# Altium PCB PCB2.pcbdoc
Units mil, origin at the board's own origin, x right, y up, seen from the top; angles counter-clockwise.
Board outline 2600 x 1800 mil, 2 copper layers (Top Layer, Bottom Layer); 16 components, 8 nets, 47 pads, 0 vias.
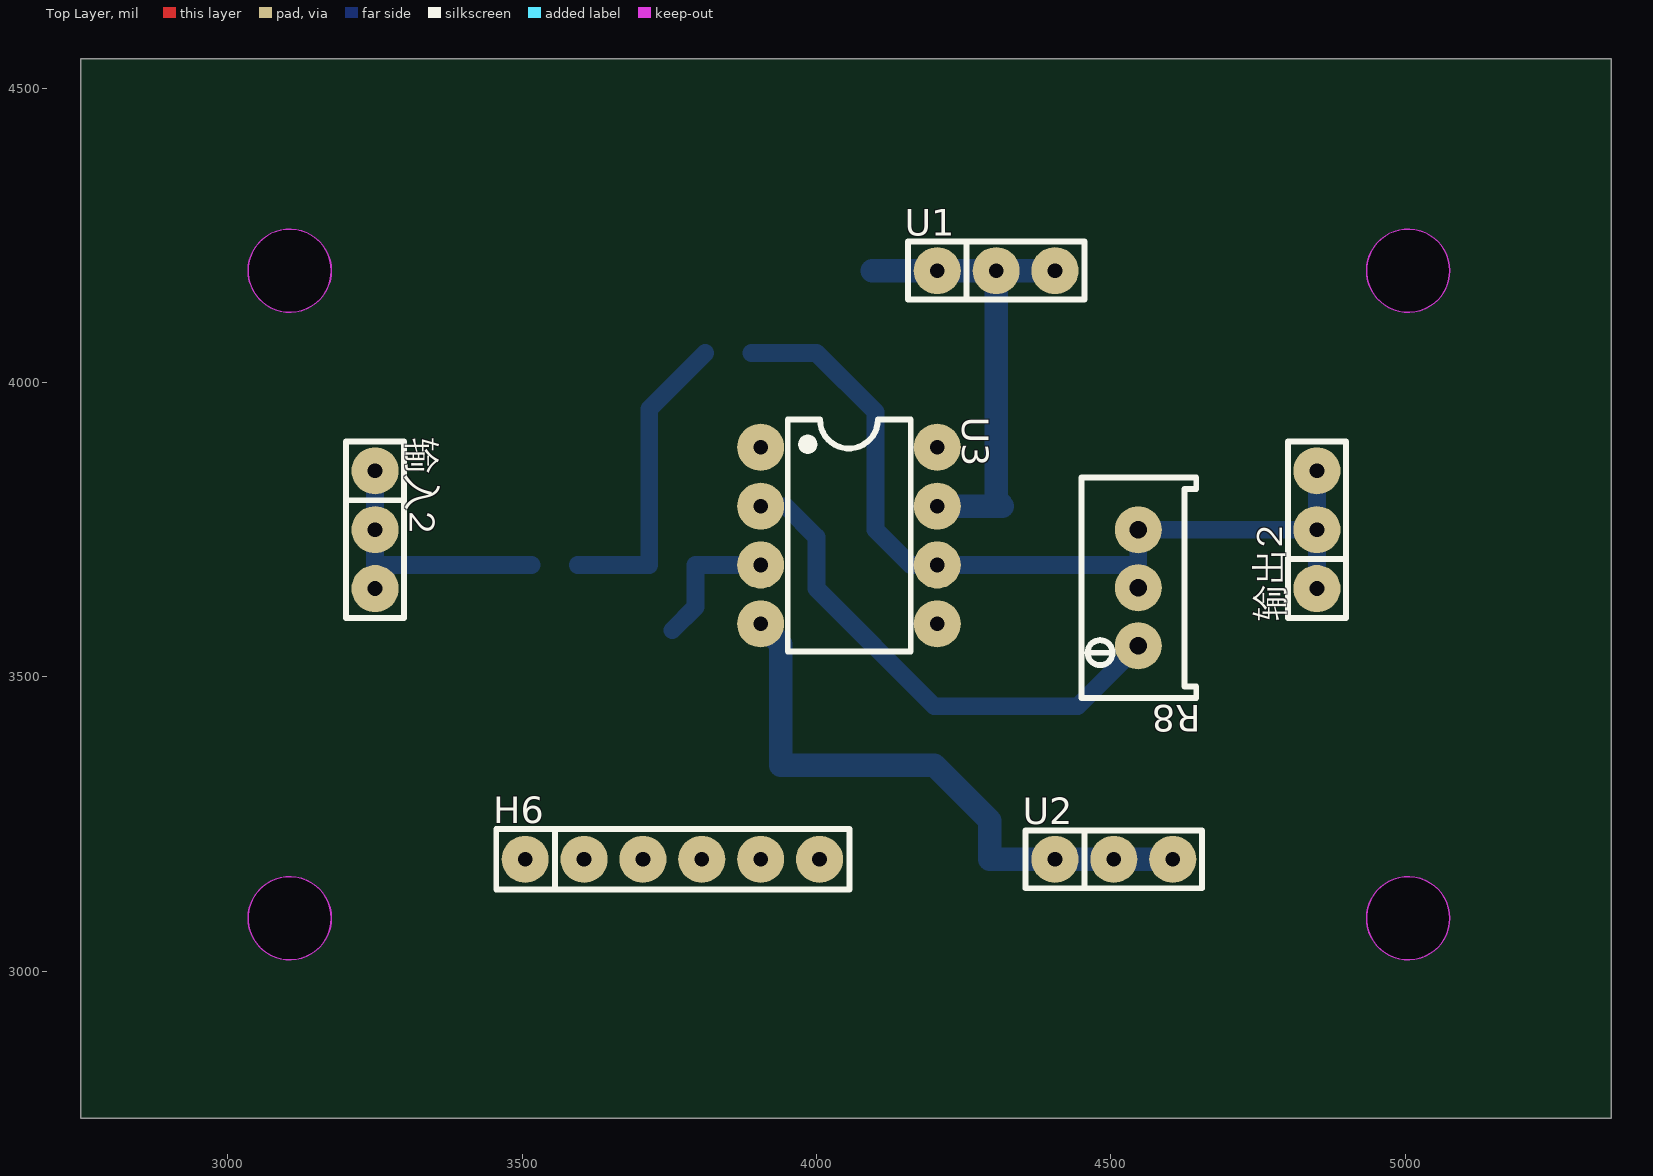
[diagram p0: Top Layer view]
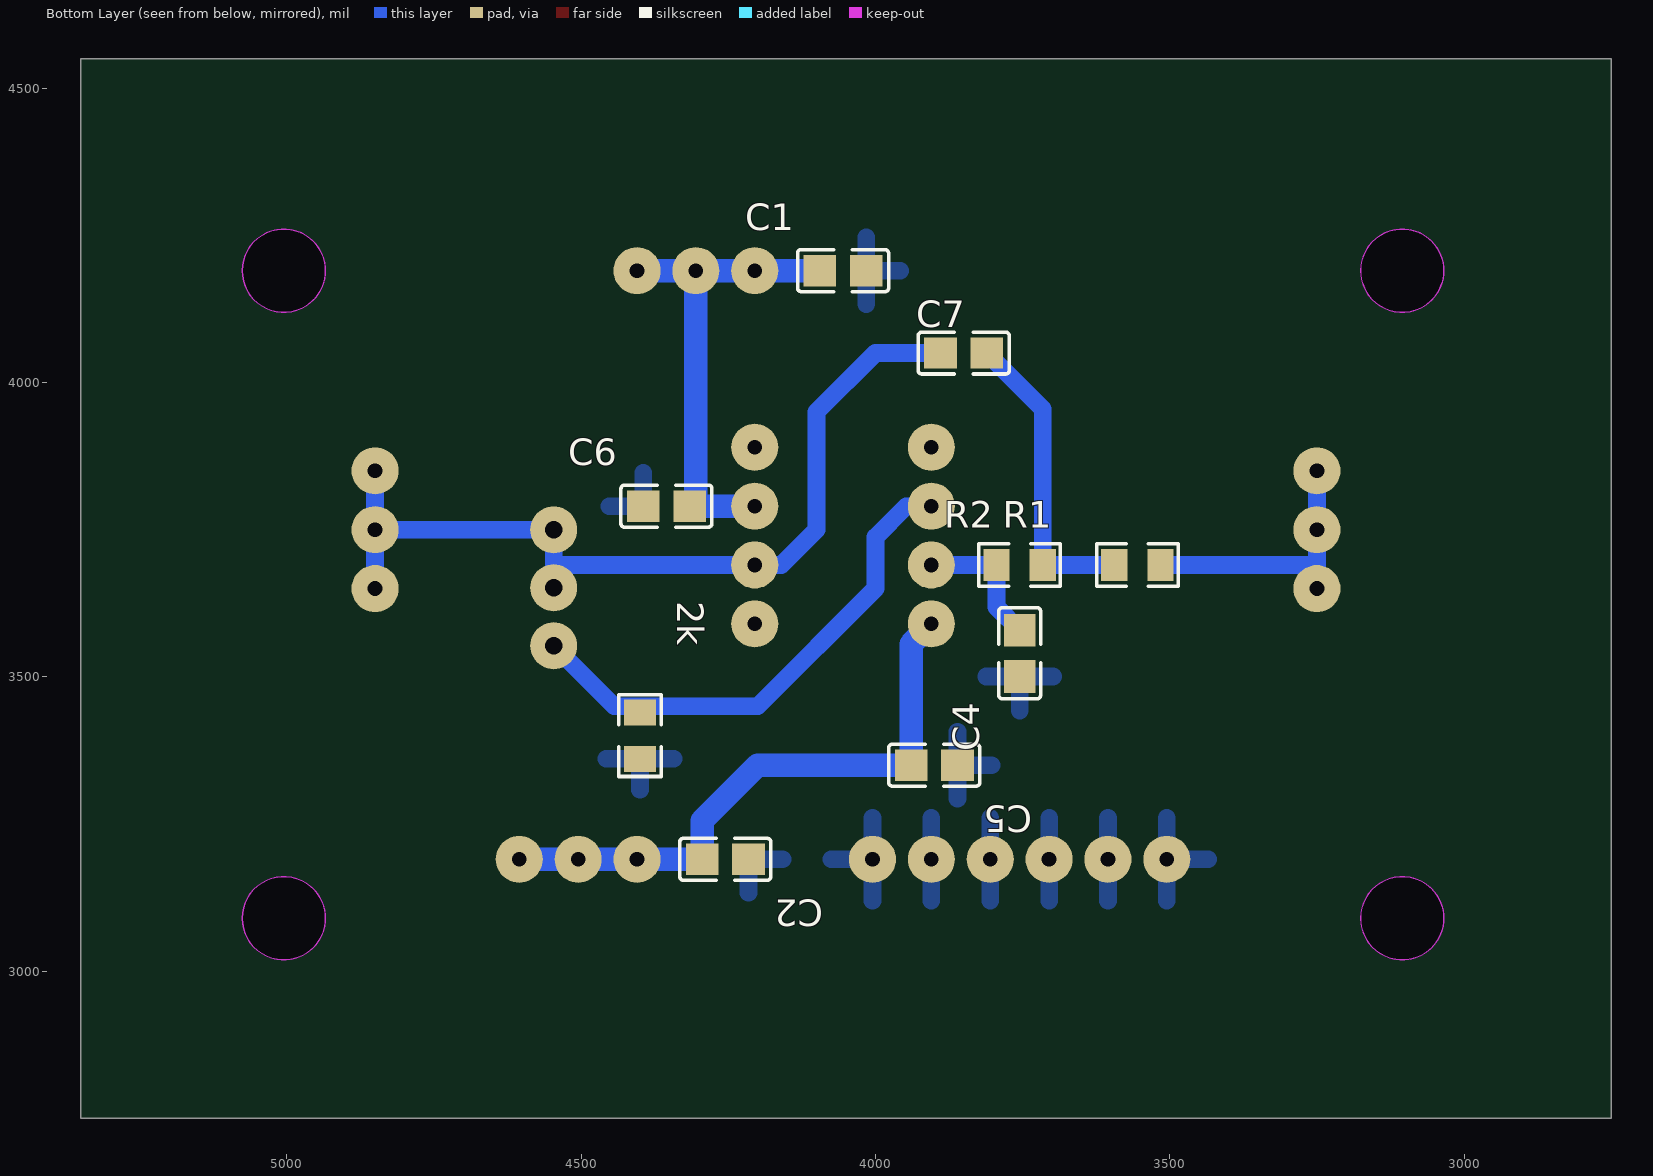
[diagram p1: Bottom Layer view, seen from below]

## Layer stack, top to bottom
Top Layer: signal copper (thickness not stored)
Dielectric: dielectric 12.6, FR-4, Dk 4.8
Bottom Layer: signal copper (thickness not stored)

## Board outline
5350,2750 2750,2750 2750,4550 5350,4550
cut-out: 3175.71,4190 cw(c3105,4190) 3034.29,4190 cw(c3105,4190)
cut-out: 3175.71,3090 cw(c3105,3090) 3034.29,3090 cw(c3105,3090)
cut-out: 5075.71,3090 cw(c5005,3090) 4934.29,3090 cw(c5005,3090)
cut-out: 5075.71,4190 cw(c5005,4190) 4934.29,4190 cw(c5005,4190)

## Design rules (kind name [scope] priority, off if disabled: settings)
BoardOutlineClearance copperThickness1oz [All] p0: genericclearance=10 ignorepadtopadclearanceinfootprint=FALSE except(0: Arc-SplitContinuation Track-SplitContinuation SMDPad-SplitContinuation THPad-SplitContinuation Via-SplitContinuation Fill-SplitContinuation Poly-SplitContinuation Region-SplitContinuation Text-SplitContinuation; 6: Track-CutoutEdge SMDPad-CutoutEdge THPad-CutoutEdge Via-CutoutEdge Region-CutoutEdge; 11.8: Track-OutlineEdge SMDPad-OutlineEdge THPad-OutlineEdge Via-OutlineEdge Fill-OutlineEdge Region-OutlineEdge Poly-OutlineEdge Text-OutlineEdge Fill-CutoutEdge)
BoardOutlineClearance copperThickness2oz [All] p0: genericclearance=10 ignorepadtopadclearanceinfootprint=FALSE except(0: Arc-SplitContinuation Track-SplitContinuation SMDPad-SplitContinuation THPad-SplitContinuation Via-SplitContinuation Fill-SplitContinuation Poly-SplitContinuation Region-SplitContinuation Text-SplitContinuation; 6: Track-CutoutEdge SMDPad-CutoutEdge THPad-CutoutEdge Via-CutoutEdge Region-CutoutEdge; 11.8: Track-OutlineEdge SMDPad-OutlineEdge THPad-OutlineEdge Via-OutlineEdge Fill-OutlineEdge Region-OutlineEdge Poly-OutlineEdge Text-OutlineEdge Fill-CutoutEdge)
Clearance copperThickness1oz [(InNet('GND') OR InNet('-12V') OR InNet('+12V') OR InNet('$1N765') OR InNet('$1N750') OR InNet('$1N769') OR InNet('$1N737') OR InNet('$1N742'))] p1: gap=7 ignorepadtopadclearanceinfootprint=FALSE except(4: Track-Track; 6: Track-SMDPad SMDPad-SMDPad Track-THPad SMDPad-THPad THPad-THPad Track-Via SMDPad-Via THPad-Via Via-Via SMDPad-Fill THPad-Fill Via-Fill Fill-Fill Track-Region SMDPad-Region THPad-Region Via-Region Region-Region Track-Poly SMDPad-Poly THPad-Poly Via-Poly Fill-Poly Region-Poly Poly-Poly Track-Text SMDPad-Text THPad-Text Via-Text Fill-Text Region-Text Poly-Text Text-Text; 6.9: Track-Hole SMDPad-Hole THPad-Hole Via-Hole Fill-Hole Region-Hole Poly-Hole Text-Hole Sheet-Hole; 11.8: Track-Fill Fill-Region Track-Sheet SMDPad-Sheet THPad-Sheet Via-Sheet Fill-Sheet Region-Sheet Poly-Sheet Text-Sheet)
Clearance copperThickness2oz [All] p1: gap=7 ignorepadtopadclearanceinfootprint=FALSE except(6: Track-SMDPad SMDPad-SMDPad Track-THPad SMDPad-THPad THPad-THPad Track-Via SMDPad-Via THPad-Via Via-Via SMDPad-Fill THPad-Fill Via-Fill Fill-Fill Track-Region SMDPad-Region THPad-Region Via-Region Region-Region Track-Poly SMDPad-Poly THPad-Poly Via-Poly Fill-Poly Region-Poly Poly-Poly Track-Text SMDPad-Text THPad-Text Via-Text Fill-Text Region-Text Poly-Text Text-Text; 6.9: Track-Hole SMDPad-Hole THPad-Hole Via-Hole Fill-Hole Region-Hole Poly-Hole Text-Hole Sheet-Hole; 8: Track-Track; 11.8: Track-Fill Fill-Region Track-Sheet SMDPad-Sheet THPad-Sheet Via-Sheet Fill-Sheet Region-Sheet Poly-Sheet Text-Sheet)
DiffPairsRouting differentialPair [All] p1: maxuncoupledlength=10 minlimit=6 maxlimit=6 mostfreqgap=6 toplayer_minwidth=5 toplayer_prefwidth=10 toplayer_maxwidth=100 bottomlayer_minwidth=5 bottomlayer_prefwidth=10 bottomlayer_maxwidth=100
PasteMaskExpansion pasteMaskExpansion [All] p1: expansion=0
PlaneConnect innerPlane [All] p1: planeconnectstyle=Relief reliefexpansion=20 reliefentries=4 reliefconductorwidth=10 reliefairgap=10
PolygonConnect copperRegion [All] p1: connectstyle=Relief reliefentries=4 reliefconductorwidth=10 polygonreliefangle="90 Angle" airgapwidth=10
PolygonConnect copperRegion1 [All] p1: connectstyle=Relief reliefentries=4 reliefconductorwidth=30 polygonreliefangle="90 Angle" airgapwidth=30
RoutingVias viaSize [All] p1: viastyle="Through Hole" holewidth=12.0078 minholewidth=11.811 maxholewidth=248.0314 width=24.0158 minwidth=19.685 maxwidth=393.7008
SolderMaskExpansion solderMaskExpansion [All] p1: useseparateexpansions=TRUE expansion=2 expansionbottom=2
Width copperThickness1oz [All] p1: maxlimit=100 minlimit=5 preferedwidth=10
Width copperThickness2oz [All] p1: maxlimit=100 minlimit=8 preferedwidth=10

## Components (designator, comment, footprint, x,y, rotation, side; value= is the part's Value field where it differs from the comment)
2k "MF1/4W-1K±1%-ST52" R0805 4400,3400 r270 bottom
C1 "ERS1HM4R7D11OT" C0805 4055,4190 r180 bottom
C2 "ERS1HM4R7D11OT" C0805 4255,3190 r0 bottom
C4 "CAP_0603" C0805 3755,3540 r90 bottom
C5 "R08B1B102KN0B0S0N0" C0805 3900,3350 r0 bottom
C6 "R08B1B102KN0B0S0N0" C0805 4355,3790 r180 bottom
C7 "CAP_0603" C0805 3850,4050 r180 bottom
H6 "PZ254V-11-06P" HDR-TH_6P-P2.54-V-M 3755,3190 r0 top
R1 "MF1/4W-1K±1%-ST52" R0805 3555,3690 r180 bottom
R2 "MF1/4W-1K±1%-ST52" R0805 3755,3690 r180 bottom
R8 "3296W-1-103LF" RES-ADJ-TH_3P-L10.0-W10.0-P2.50-BL-BS 4546.57,3651.25 r180 top
U1 "PZ254V-11-03P" HDR-TH_3P-P2.54-V-M 4305,4190 r0 top
U2 "PZ254V-11-03P" HDR-TH_3P-P2.54-V-M 4505,3190 r0 top
U3 "OPA277N" PDIP-8_L9.6-W6.4-P2.54-LS7.6-BL 4055,3740 r270 top
输入2 "PZ254V-11-03P" HDR-TH_3P-P2.54-V-M 3250,3750 r270 top
输出2 "PZ254V-11-03P" HDR-TH_3P-P2.54-V-M 4850,3750 r90 top

## Footprints (in the part's own frame and the unit in brackets; to place one, negate y for a bottom-side part, rotate by r counter-clockwise, add the part's x,y. Pads: shape width x height; smd on the part's side, far side on the other; paste and mask are expansions set on the pad)
C0805 [mm]
  rect 1.41x1.35 smd: 1(-1,0) 2(1,0)
  silkscreen extent -1.96,-0.9 1.96,0.9
HDR-TH_3P-P2.54-V-M [mil]
  round 80 hole 25: 1(-100,0) 2(0,0) 3(100,0)
  silkscreen extent -150,-49 150,49
HDR-TH_6P-P2.54-V-M [mil]
  round 80 hole 25: 1(-250,0) 2(-150,0) 3(-50,0) 4(50,0) 5(150,0) 6(250,0)
  silkscreen extent -299,-51 301,51
PDIP-8_L9.6-W6.4-P2.54-LS7.6-BL [mil]
  round 80 hole 25: 1(-150,-150) 2(-50,-150) 3(50,-150) 4(150,-150) 5(150,150) 6(50,150) 7(-50,150) 8(-150,150)
  silkscreen extent -197,-104 197,105
R0805 [mm]
  rect 1.133x1.377 smd: 1(-1,0) 2(1,0)
  silkscreen extent -1.76,-0.92 1.76,0.92
RES-ADJ-TH_3P-L10.0-W10.0-P2.50-BL-BS [mil]
  round 80 hole 30: 1(0,98.42) 2(0,0) 3(0,-98.43)
  silkscreen extent -98,-187 96,187

## Nets (pads, with @x,y where several pads share a name; then routed paths per layer and width w, separated by ;. In a path a pad name is that pad's centre, name@x,y a point inside that pad or via, vN(x,y) a via of type N, cw(c..) or ccw(c..) an arc to the next point about the centre after c; other vN are vias at no path point)
$1N737: 2k.1 R8.1 U3.2 | length 876.2
  Bottom Layer w30: U3.2 3947.43,3790 4000,3737.43 4000,3650 4200,3450 4443.74,3450 R8.1
$1N742: C7.1 R8.2 R8.3 U3.6 输出2.1 输出2.2 输出2.3 | length 1525.8
  Bottom Layer w30: C7.1 4000,4050 4100,3950 4100,3750 4160,3690 U3.6 4545.63,3690 R8.2@4546.57,3690.95 ; R8.2 R8.2@4546.57,3690.95 ; 输出2.1 输出2.2 ; 输出2.3 输出2.2 ; R8.2@4546.57,3690.95 R8.3 4849.68,3749.68 输出2.2
$1N750: R1.2 输入2.1 输入2.2 输入2.3 | length 465.6
  Bottom Layer w30: 输入2.3 3250,3690 ; 输入2.1 输入2.2 3250,3690 ; R1.2 3250,3690
$1N765: C4.2 R2.1 U3.3 | length 237.6
  Bottom Layer w30: C4.2 3794.37,3618.74 R2.1 U3.3
$1N769: C7.2 R1.1 R2.2 | length 520.6
  Bottom Layer w30: R1.1 R2.2 3715.63,3955 C7.2
+12V: C1.1 C6.2 U1.1 U1.2 U1.3 U3.7 | length 825.7
  Bottom Layer w40: C1.1 U1.1 U1.2 ; U3.7 C6.2 4305,3800.63 U1.2 ; U1.3 U1.2
-12V: C2.2 C5.2 U2.1 U2.2 U2.3 U3.4 | length 1024.6
  Bottom Layer w40: U3.4 3939.37,3555.63 C5.2 4200,3350 4294.37,3255.63 C2.2 U2.1 U2.2 U2.3
GND: 2k.2 C1.2 C2.1 C4.1 C5.1 C6.1 H6.1 H6.2 H6.3 H6.4 H6.5 H6.6
pads on no net: U3.1 U3.5 U3.8

## Polygon pours and split planes (outlines as drawn)
GND on Bottom Layer (solid, remove dead copper, pour order 0): 3000,4300 5100,4300 5100,3000 3000,3000

## Keep-outs
Board Outline Layer:
  circle w1: c3105,4190 r70.71
  region: 3175.71,4190 cw(c3105,4190) 3034.29,4190 cw(c3105,4190)
  circle w1: c3105,3090 r70.71
  region: 3175.71,3090 cw(c3105,3090) 3034.29,3090 cw(c3105,3090)
  circle w1: c5005,3090 r70.71
  region: 5075.71,3090 cw(c5005,3090) 4934.29,3090 cw(c5005,3090)
  circle w1: c5005,4190 r70.71
  region: 5075.71,4190 cw(c5005,4190) 4934.29,4190 cw(c5005,4190)

## Silkscreen, mask and mechanical layers (free items; w line width, h text height)
Mechanical Layer:
  circle w1: c3105,4190 r70.71
  circle w1: c3105,3090 r70.71
  circle w1: c5005,3090 r70.71
  circle w1: c5005,4190 r70.71